# Altium PCB Rylan Power Board.PcbDoc
Units mil, origin at the board's own origin, x right, y up, seen from the top; angles counter-clockwise.
Board outline 6000 x 4000 mil, 2 copper layers (Top Layer, Bottom Layer); 103 components, 82 nets, 250 pads, 0 vias.
Unrouted connection lines stored in the file: 157.
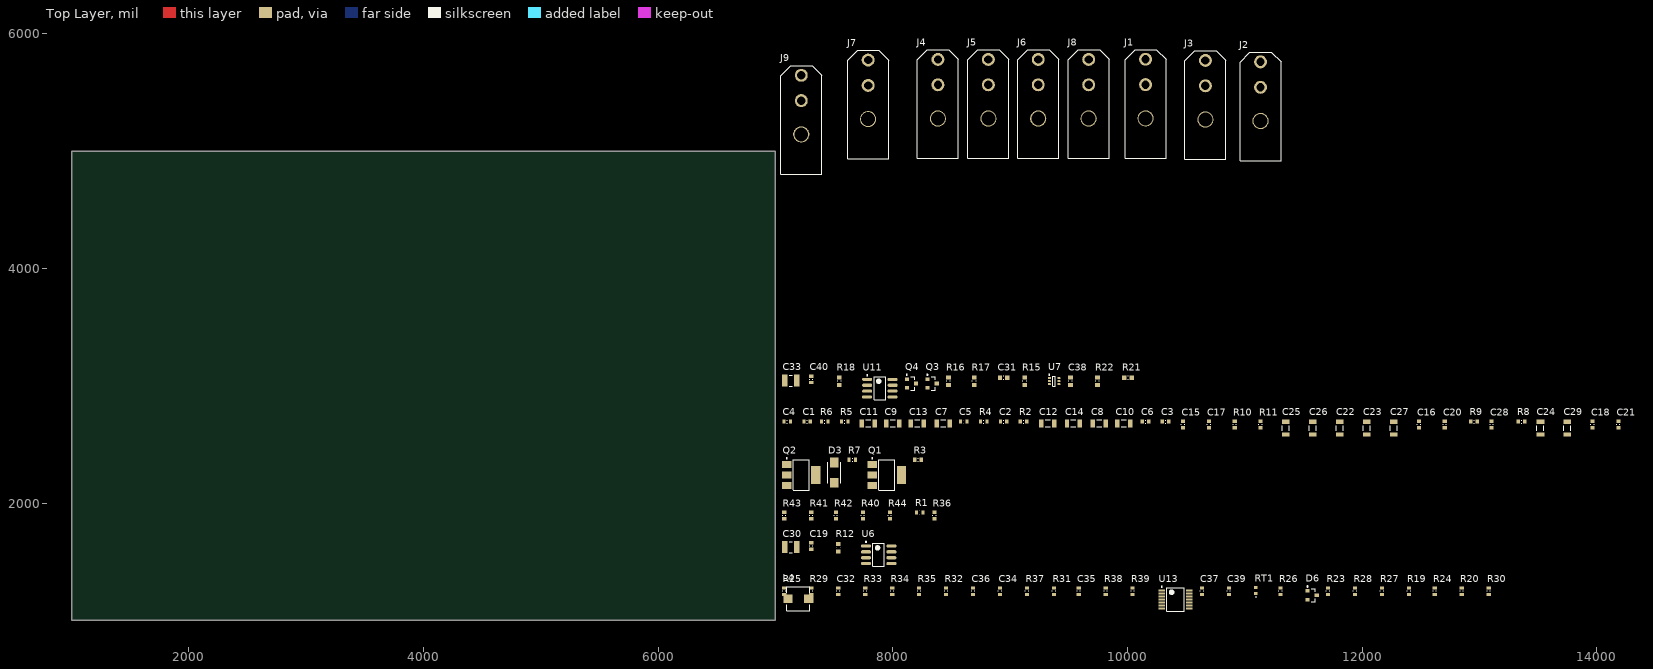
[diagram p0: Top Layer view]
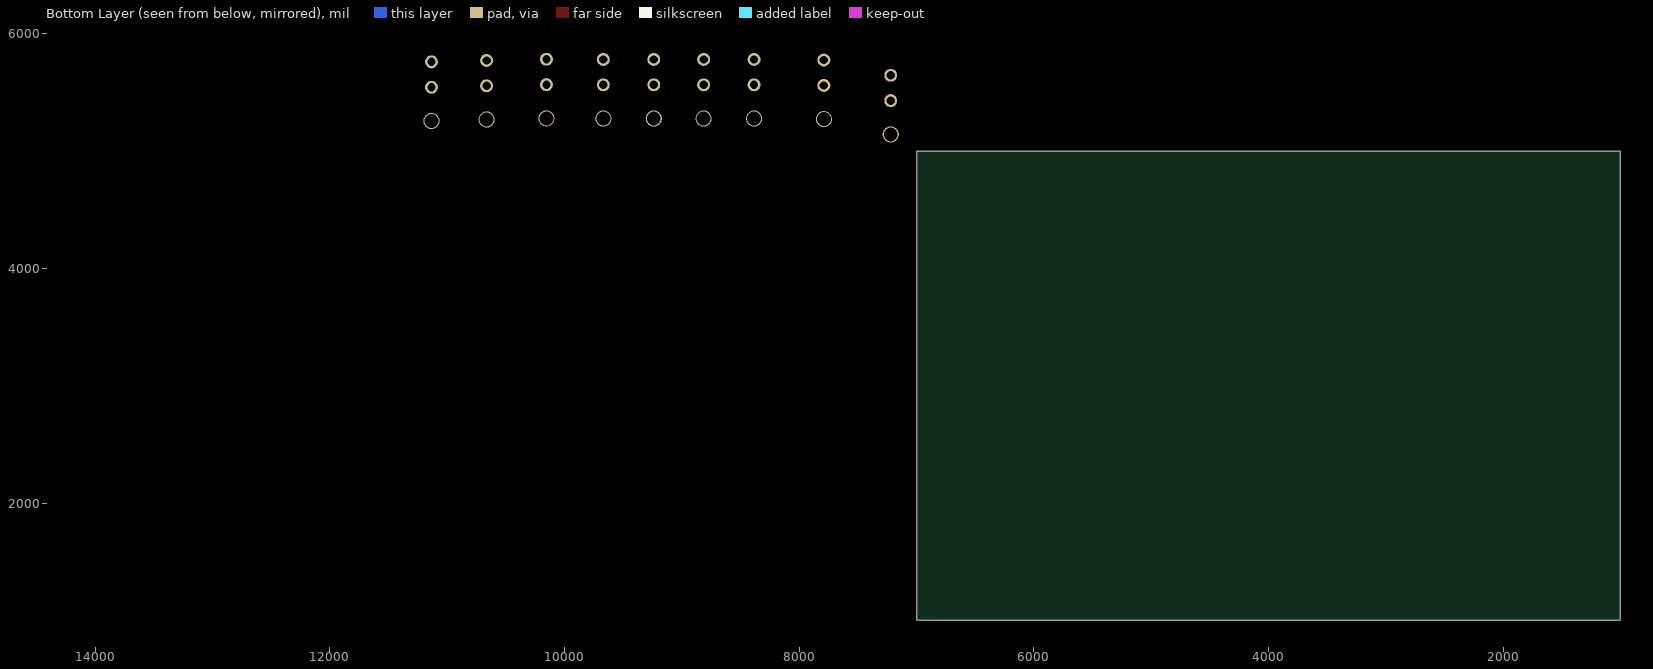
[diagram p1: Bottom Layer view, seen from below]

## Layer stack, top to bottom
Top Solder: solder mask 0.4, Solder Resist, Dk 3.5
Top Layer: signal copper 1.4
Dielectric 1: dielectric 12.6, FR-4, Dk 4.8
Bottom Layer: signal copper 1.4
Bottom Solder: solder mask 0.4, Solder Resist, Dk 3.5

## Board outline
1000,1000 7000,1000 7000,5000 1000,5000

## Design rules (kind name [scope] priority, off if disabled: settings)
Clearance [All] p1: gap=10 ignorepadtopadclearanceinfootprint=FALSE except(0: Arc-Hole Track-Hole SMDPad-Hole THPad-Hole Via-Hole Fill-Hole Poly-Hole Region-Hole Text-Hole)
PolygonConnect [All] p1: connectstyle=Relief reliefconductorwidth=10 reliefentries=4 polygonreliefangle="90 Angle" airgapwidth=10
RoomDefinition U_Thrusters [InComponentClass('U_Thrusters')] p1: confinementstyle=ConfineIn formatcopy=TRUE lockcomponents=FALSE outline 7045,2870 10110,2870 10110,3210 7045,3210
RoomDefinition U_Regulators [InComponentClass('U_Regulators')] p2: confinementstyle=ConfineIn formatcopy=TRUE lockcomponents=FALSE outline 7045,2555 14330,2555 14330,2825 7045,2825
RoomDefinition U_Power [InComponentClass('U_Power')] p3: confinementstyle=ConfineIn formatcopy=TRUE lockcomponents=FALSE outline 7045,2100 8295,2100 8295,2500 7045,2500
RoomDefinition U_Interface [InComponentClass('U_Interface')] p4: confinementstyle=ConfineIn formatcopy=TRUE lockcomponents=FALSE outline 7045,1840 8520,1840 8520,2050 7045,2050
RoomDefinition U_External [InComponentClass('U_External')] p5: confinementstyle=ConfineIn formatcopy=TRUE lockcomponents=FALSE outline 7045,1450 8045,1450 8045,1790 7045,1790
RoomDefinition U_BMS [InComponentClass('U_BMS')] p6: confinementstyle=ConfineIn formatcopy=TRUE lockcomponents=FALSE outline 7045,1060 13245,1060 13245,1405 7045,1405
RoutingVias [All] p1: holewidth=28 width=50 viastyle="Through Hole" minholewidth=28 minwidth=50 maxholewidth=28 maxwidth=50
SolderMaskExpansion [All] p1: expansion=4 istentingtop=FALSE
Width [All] p1: maxlimit=10 minlimit=10 preferedwidth=10
30 further rules are at their usual default settings.

## Classes and differential pairs
component class U_Thrusters: C31 C33 C38 C40 D4 D5 D16 J1 J2 J3 J4 J5 J6 J7 J8 Q3 Q4 R15 R16 R17 R18 R21 R22 U7 U8 U9 U11 U12
component class U_Regulators: C1 C2 C3 C4 C5 C6 C7 C8 C9 C10 C11 C12 C13 C14 C15 C16 C17 C18 C20 C21 C22 C23 C24 C25 C26 C27 C28 C29 F1 F2 F3 F4 L1 L2 L3 L4 R2 R4 R5 R6 R8 R9 R10 R11 U1 U2 U4 U5
component class U_Power: D2 D3 NT1 P2 Q1 Q2 R3 R7 R13 R14
component class U_Interface: D1 D11 D18 D19 D20 D21 D22 MH1 MH2 MH3 MH4 P1 P3 R1 R36 R40 R41 R42 R43 R44 TP1 TP2 TP3 TP4 TP5 TP6 TP7 TP8 TP9 TP10
component class U_External: C19 C30 D15 J9 R12 U3 U6
component class U_BMS: C32 C34 C35 C36 C37 C39 D6 D7 D8 D9 D10 D12 D13 D14 D17 R19 R20 R23 R24 R25 R26 R27 R28 R29 R30 R31 R32 R33 R34 R35 R37 R38 R39 RT1 U10 U13

## Components (designator, comment, footprint, x,y, rotation, side; value= is the part's Value field where it differs from the comment)
C1 "1uF 25V" CAPC0603(1608)100_L 7270,2695 r0 top value=1uF
C2 "30pF" CAPC0603(1608)100_L 8945,2695 r0 top
C3 "100nF" CAPC0603(1608)100_L 10325,2695 r0 top
C4 "1uF 25V" CAPC0603(1608)100_L 7100,2695 r0 top value=1uF
C5 "30pF" CAPC0603(1608)100_L 8605,2695 r0 top
C6 "100nF" CAPC0603(1608)100_L 10155,2695 r0 top
C7 "4.7uF" CAPC1206(3216)190_L 8430,2680 r0 top
C8 "4.7uF" CAPC1206(3216)190_L 9760,2680 r0 top
C9 "47uF" CAPC1206(3216)190_L 8000,2680 r0 top
C10 "4.7uF" CAPC1206(3216)190_L 9970,2680 r0 top
C11 "47uF" CAPC1206(3216)190_L 7790,2680 r0 top
C12 "4.7uF" CAPC1206(3216)190_L 9320,2680 r0 top
C13 "4.7uF" CAPC1206(3216)190_L 8210,2680 r0 top
C14 "4.7uF" CAPC1206(3216)190_L 9540,2680 r0 top
C15 "1uF 25V" CAPC0603(1608)100_L 10475,2670 r90 top value=1uF
C16 "12pF" CAPC0603(1608)100_L 12485,2670 r90 top
C17 "1uF 25V" CAPC0603(1608)100_L 10695,2670 r90 top value=1uF
C18 "680nF" CAPC0603(1608)100_L 13965,2670 r90 top
C19 "10nF" CAPC0603(1608)100_L 7305,1635 r90 top
C20 "75pF" CAPC0603(1608)100_L 12705,2670 r90 top
C21 "100nF" CAPC0603(1608)100_L 14185,2670 r90 top
C22 "4.7uF" CAPC1206(3216)190_L 11810,2640 r90 top
C23 "4.7uF" CAPC1206(3216)190_L 12040,2640 r90 top
C24 "4.7uF" CAPC1206(3216)190_L 13520,2640 r90 top
C25 "CAP 22uF 16V 1206(3216)" CAPC1206(3216)190_L 11350,2640 r90 top value=22uF
C26 "47uF" CAPC1206(3216)190_L 11580,2640 r90 top
C27 "10uF" CAPC1206(3216)190_L 12270,2640 r90 top
C28 "100nF" CAPC0603(1608)100_L 13105,2670 r90 top
C29 "4.7uF" CAPC1206(3216)190_L 13750,2640 r90 top
C30 "CAP 22uF 25V 1210(3225)" CAPC1210(3225)220_L 7130,1625 r0 top value=22uF
C31 "100nF" CAPC0603(1608)100_N 8945,3070 r0 top
C32 "100nF" CAPC0603(1608)100_L 7535,1250 r90 top
C33 "CAP 22uF 25V 1210(3225)" CAPC1210(3225)220_L 7130,3045 r0 top value=22uF
C34 "100nF" CAPC0603(1608)100_L 8915,1250 r90 top
C35 "100nF" CAPC0603(1608)100_L 9585,1250 r90 top
C36 "100nF" CAPC0603(1608)100_L 8685,1250 r90 top
C37 "1uF 25V" CAPC0603(1608)100_L 10635,1250 r90 top value=1uF
C38 "100nF" CAPC0603(1608)100_N 9515,3040 r90 top
C39 "1uF 25V" CAPC0603(1608)100_L 10865,1250 r90 top value=1uF
C40 "10nF" CAPC0603(1608)100_L 7305,3055 r90 top
D3 "SMAJ30CA" LFUS-DO-214AC-A-2_V 7500,2260 r90 top
D6 "MMBZ5V6ALT1G" ONSC-SOT-23-3-318-08_V 11575,1215 r0 top
J1 "" "2-pin Megafit RA" 10155,4941.42 r0 top
J2 "" "2-pin Megafit RA" 11135,4919.02 r0 top
J3 "" "2-pin Megafit RA" 10665,4931.42 r0 top
J4 "" "2-pin Megafit RA" 8385,4940 r0 top
J5 "" "2-pin Megafit RA" 8815,4940 r0 top
J6 "" "2-pin Megafit RA" 9240,4940 r0 top
J7 "" "2-pin Megafit RA" 7790,4935 r0 top
J8 "" "2-pin Megafit RA" 9670,4940 r0 top
J9 "" "2-pin Megafit RA" 7220,4805 r0 top
L4 "6.8uH" "BOURNS SRP5030T" 7195,1185 r0 top
Q1 "NVF6P02T3G" ONSC-SOT-223-4-318E-04_V 7950,2240 r0 top
Q2 "NVF6P02T3G" ONSC-SOT-223-4-318E-04_V 7220,2240 r0 top
Q3 "NVTR01P02LT1G" ONSC-SOT-23-3-318-08_V 8335,3020 r0 top
Q4 "NVTR01P02LT1G" ONSC-SOT-23-3-318-08_V 8160,3020 r0 top
R1 "1K2" RESC0603(1608)_L 8230,1920 r0 top value="1200.00 Ohm"
R2 "88K7 1%" RESC0603(1608)_L 9115,2695 r0 top value="88700.00 Ohm"
R3 "4K7" RESC0603(1608)_L 8215,2370 r0 top value="4700.00 Ohm"
R4 "88K7 1%" RESC0603(1608)_L 8775,2695 r0 top value="88700.00 Ohm"
R5 "22K1 1%" RESC0603(1608)_L 7590,2695 r0 top value="22100.00 Ohm"
R6 "22K1 1%" RESC0603(1608)_L 7420,2695 r0 top value="22100.00 Ohm"
R7 "4K7" RESC0603(1608)_L 7655,2370 r0 top value="4700.00 Ohm"
R8 "200K 1%" RESC0603(1608)_L 13360,2695 r0 top value="200000.00 Ohm"
R9 "51K 1%" RESC0603(1608)_L 12955,2695 r0 top value="51000.00 Ohm"
R10 "22K1 1%" RESC0603(1608)_L 10915,2670 r90 top value="22100.00 Ohm"
R11 "22K1 1%" RESC0603(1608)_L 11135,2670 r90 top value="22100.00 Ohm"
R12 "10K" RESC0603(1608)_N 7535,1620 r90 top value="10000.00 Ohm"
R15 "10K" RESC0603(1608)_N 9125,3040 r90 top value="10000.00 Ohm"
R16 "100R" RESC0603(1608)_N 8475,3040 r90 top value="100.00 Ohm"
R17 "100R" RESC0603(1608)_N 8695,3040 r90 top value="100.00 Ohm"
R18 "10K" RESC0603(1608)_N 7545,3040 r90 top value="10000.00 Ohm"
R19 "100R" RESC0603(1608)_L 12400,1250 r90 top value="100.00 Ohm"
R20 "4K7" RESC0603(1608)_L 12850,1250 r90 top value="4700.00 Ohm"
R21 "7K5 1%" RESC0603(1608)_N 10005,3070 r0 top value="7500.00 Ohm"
R22 "10K" RESC0603(1608)_N 9745,3040 r90 top value="10000.00 Ohm"
R23 "100R" RESC0603(1608)_L 11710,1250 r90 top value="100.00 Ohm"
R24 "100R" RESC0603(1608)_L 12620,1250 r90 top value="100.00 Ohm"
R25 "100R" RESC0603(1608)_L 7075,1250 r90 top value="100.00 Ohm"
R26 "16K5" RESC0603(1608)_L 11305,1250 r90 top value="16500.00 Ohm"
R27 "294K" RESC0603(1608)_L 12170,1250 r90 top value="294000.00 Ohm"
R28 "100R" RESC0603(1608)_L 11940,1250 r90 top value="100.00 Ohm"
R29 "100R" RESC0603(1608)_L 7305,1250 r90 top value="100.00 Ohm"
R30 "4K7" RESC0603(1608)_L 13080,1250 r90 top value="4700.00 Ohm"
R31 "100R 1%" RESC0603(1608)_L 9375,1250 r90 top value="100.00 Ohm"
R32 "100R 1%" RESC0603(1608)_L 8455,1250 r90 top value="100.00 Ohm"
R33 "100R" RESC0603(1608)_L 7765,1250 r90 top value="100.00 Ohm"
R34 "100R" RESC0603(1608)_L 7995,1250 r90 top value="100.00 Ohm"
R35 "100R" RESC0603(1608)_L 8225,1250 r90 top value="100.00 Ohm"
R36 "1K2" RESC0603(1608)_L 8355,1895 r90 top value="1200.00 Ohm"
R37 "100R" RESC0603(1608)_L 9145,1250 r90 top value="100.00 Ohm"
R38 "100R" RESC0603(1608)_L 9815,1250 r90 top value="100.00 Ohm"
R39 "100R" RESC0603(1608)_L 10045,1250 r90 top value="100.00 Ohm"
R40 "470R" RESC0603(1608)_L 7745,1895 r90 top value="470.00 Ohm"
R41 "220R" RESC0603(1608)_L 7305,1895 r90 top value="220.00 Ohm"
R42 "220R" RESC0603(1608)_L 7515,1895 r90 top value="220.00 Ohm"
R43 "100R" RESC0603(1608)_L 7075,1895 r90 top value="100.00 Ohm"
R44 "1K2" RESC0603(1608)_L 7975,1895 r90 top value="1200.00 Ohm"
RT1 "NCP18XH103F03RB" MURA-NCP18XH103F03RB-2_V 11095,1255 r90 top
U6 "MIC5021YM" MICL-SOICN-8LD-PL-1_V 7880,1560 r0 top
U7 "SN74LVC1G97QDCKRQ1" DCK0006A_L 9375,3040 r0 top
U11 "MIC5021YM" MICL-SOICN-8LD-PL-1_V 7890,2980 r0 top
U13 "SN74HC164PW" PW0014A_N 10410,1180 r0 top

## Footprints (in the part's own frame and the unit in brackets; to place one, negate y for a bottom-side part, rotate by r counter-clockwise, add the part's x,y. Pads: shape width x height; smd on the part's side, far side on the other; paste and mask are expansions set on the pad)
"2-pin Megafit RA" [mm]
  round 2.8 hole 1.8: 1(0,15.9) 2(0,21.4)
  round 3.5 hole 3: ""(0,8.6)
  silkscreen extent -4.44,0 4.44,23.49, body extent -4.16,-24.98 4.19,21.9, height 16.75
"BOURNS SRP5030T" [mm] "Precision Wire Wound Inductor, 2-Leads, Body 5.70x5.20mm, IPC Medium Density"
  rect 2x1.8 smd: 1(-2.25,0) 2(2.25,0)
  silkscreen extent -2.5,-2.6 2.5,2.6, body extent -2.85,-2.6 2.85,2.6, height 3
CAPC0603(1608)100_L [mm] "Chip Capacitor, Body 1.6x0.8mm, Height 1.0mm, IPC High Density"
  rect 0.7x0.9 smd: 1(-0.7,0) 2(0.7,0)
  silkscreen extent -0.05,-0.35 0.05,0.35, body extent -0.87,-0.47 0.88,0.48, height 1
CAPC0603(1608)100_N [mm] "Chip Capacitor, Body 1.6x0.8mm, Height 1.0mm, IPC Medium Density"
  rect 0.9x1 smd: 1(-0.8,0) 2(0.8,0)
  silkscreen extent -0.05,-0.4 0.05,0.4, body extent -0.87,-0.48 0.88,0.47, height 1
CAPC1206(3216)190_L [mm] "Chip Capacitor, Body 3.2x1.6mm, Height 1.9mm, IPC High Density"
  rect 0.95x1.7 smd: 1(-1.4,0) 2(1.4,0)
  silkscreen extent -0.55,-0.75 0.55,0.75, body extent -1.7,-0.9 1.7,0.9, height 1.9
CAPC1210(3225)220_L [mm] "Chip Capacitor, Body 3.2x2.5mm, Height 2.2mm, IPC High Density"
  rect 1.2x2.6 smd: 1(-1.275,0) 2(1.275,0)
  silkscreen extent -0.3,-1.2 0.3,1.2, body extent -1.7,-1.35 1.7,1.35, height 2.2
DCK0006A_L [mm] "SOT23, 6-Leads, Body 2.15x1.4mm, Pitch 0.65mm, IPC High Density"
  rrect25% 0.65x0.4 smd: 1(-1.025,0.65) 2(-1.025,0) 3(-1.025,-0.65) 4(1.025,-0.65) 5(1.025,0) 6(1.025,0.65)
  silkscreen extent -1.15,-1.1 0.3,1.52, body extent -1.14,-1 1.14,1, height 0.94
LFUS-DO-214AC-A-2_V [mm] "Molded Diode, 2-Leads, Body 4.6x2.79mm"
  rect 2.1x1.8 smd: 1(-2.2,0) 2(2.2,0)
  silkscreen extent -2.3,-1.4 2.3,1.4, body extent -2.52,-1.4 2.52,1.4, height 2.29
MICL-SOICN-8LD-PL-1_V [mm] "SOIC, 8-Leads, Body 5x4mm, Pitch 1.27mm"
  oval 2.2x0.7 smd: 1(-2.75,1.905) 2(-2.75,0.635) 3(-2.75,-0.635) 4(-2.75,-1.905) 5(2.75,-1.905) 6(2.75,-0.635) 7(2.75,0.635) 8(2.75,1.905)
  silkscreen extent -2.87,-2.5 1.25,2.93, body extent -3.01,-2.44 3.01,2.45, height 1.73
MURA-NCP18XH103F03RB-2_V [mm] "Chip, 2-Leads, Body 1.6x0.8mm"
  rect 0.65x0.7 smd: 1(-0.675,0) 2(0.675,0)
  silkscreen extent -1.45,-0.05 -1.35,0.05, body extent -0.8,-0.4 0.8,0.4, height 0.8
ONSC-SOT-23-3-318-08_V [mm] "SOT23, 3-Leads, Body 2.92x1.3mm, Pitch 0.95mm"
  rect 0.9x0.8 smd: 1(-1,0.95) 2(-1,-0.95) 3(1,0)
  silkscreen extent -1.12,-1.46 0.65,2.02, body extent -0.65,-1.46 0.65,1.46, height 1.11
ONSC-SOT-223-4-318E-04_V [mm] "SOT223, 4-Leads, Body 6.5x3.5mm, Pitch 2.3mm"
  rect 2x1.5 smd: 1(-3.15,2.3) 2(-3.15,0) 3(-3.15,-2.3)
  rect 2x3.8 smd: 4(3.15,0)
  silkscreen extent -3.27,-3.25 1.75,3.72, body extent -1.75,-3.25 1.75,3.25, height 1.75
PW0014A_N [mm] "SOP, 14-Leads, Body 5.1x4.5mm, Pitch 0.65mm, IPC Medium Density"
  rrect22% 1.4x0.45 smd: 1(-2.95,1.95) 2(-2.95,1.3) 3(-2.95,0.65) 4(-2.95,0) 5(-2.95,-0.65) 6(-2.95,-1.3) 7(-2.95,-1.95) 8(2.95,-1.95) 9(2.95,-1.3) 10(2.95,-0.65) 11(2.95,0) 12(2.95,0.65) 13(2.95,1.3) 14(2.95,1.95)
  silkscreen extent -3.07,-2.55 1.85,2.85, body extent -3.21,-2.5 3.21,2.5, height 1
RESC0603(1608)_L [mm] "Chip Resistor, Body 1.6x0.8mm, IPC High Density"
  rect 0.7x0.9 smd: 1(-0.7,0) 2(0.7,0)
  silkscreen extent -0.05,-0.35 0.05,0.35, body extent -0.85,-0.47 0.85,0.47, height 0.6
RESC0603(1608)_N [mm] "Chip Resistor, Body 1.6x0.8mm, IPC Medium Density"
  rect 0.9x1 smd: 1(-0.8,0) 2(0.8,0)
  silkscreen extent -0.05,-0.4 0.05,0.4, body extent -0.85,-0.47 0.85,0.47, height 0.6

## Part data
C1 C4 C15 C17 C37 C39: library part CMP-1035-02740-1, "CAP 1uF 25V ±10% 0603 (1608 Metric) Thickness 1mm SMD", Case-EIA=0603, Case-Metric=1608, Rated Voltage="25 V", Tolerance=Â±10%, Max Thickness="1 mm", Technology=SMT
C2 C5: library part CMP-1035-00915-1, "CAP 30pF 50V ±10% 0603 (1608 Metric) Thickness 1mm SMD", Case-EIA=0603, Case-Metric=1608, Rated Voltage="50 V", Tolerance=Â±10%, Max Thickness="1 mm", Technology=SMT
C3 C6 C21 C28 C32 C34 C35 C36: library part CMP-1035-02595-1, "CAP 100nF 100V ±10% 0603 (1608 Metric) Thickness 1mm SMD", Case-EIA=0603, Case-Metric=1608, Rated Voltage="100 V", Tolerance=Â±10%, Max Thickness="1 mm", Technology=SMT
C7 C8 C10 C12 C13 C14 C22 C23 C24 C29: library part CMP-1037-04922-1, "CAP 4.7uF 35V ±10% 1206 (3216 Metric) Thickness 1.9mm SMD", Case-EIA=1206, Case-Metric=3216, Rated Voltage="35 V", Tolerance=Â±10%, Max Thickness="1.9 mm", Technology=SMT
  C7 C13 C22 C23: Supplier 1=Digi-Key
C9 C11 C26: library part CMP-1037-05003-1, "CAP 47uF 16V ±20% 1206 (3216 Metric) Thickness 1.9mm SMD", Case-EIA=1206, Case-Metric=3216, Rated Voltage="16 V", Tolerance=Â±20%, Max Thickness="1.9 mm", Technology=SMT
C16: library part CMP-1035-00615-1, "CAP 12pF 50V ±0.25pF 0603 (1608 Metric) Thickness 1mm SMD", Case-EIA=0603, Case-Metric=1608, Rated Voltage="50 V", Tolerance=Â±0.25pF, Max Thickness="1 mm", Technology=SMT
C18: library part CMP-1035-02724-1, "CAP 680nF 50V ±10% 0603 (1608 Metric) Thickness 1mm SMD", Case-EIA=0603, Case-Metric=1608, Rated Voltage="50 V", Tolerance=Â±10%, Max Thickness="1 mm", Technology=SMT
C19 C40: library part CMP-1035-02315-1, "CAP 10nF 25V ±2% 0603 (1608 Metric) Thickness 1mm SMD", Case-EIA=0603, Case-Metric=1608, Rated Voltage="25 V", Tolerance=Â±2%, Max Thickness="1 mm", Technology=SMT
C20: library part CMP-1035-01189-1, "CAP 75pF 25V ±1% 0603 (1608 Metric) Thickness 1mm SMD", Case-EIA=0603, Case-Metric=1608, Rated Voltage="25 V", Tolerance=Â±1%, Max Thickness="1 mm", Technology=SMT
C25: library part CMP-1037-04993-1, "CAP 22uF 16V ±20% 1206 (3216 Metric) Thickness 1.9mm SMD", Case-EIA=1206, Case-Metric=3216, Rated Voltage="16 V", Tolerance=Â±20%, Max Thickness="1.9 mm", Technology=SMT
C27: library part CMP-1037-04982-1, "CAP 10uF 50V ±10% 1206 (3216 Metric) Thickness 1.9mm SMD", Case-EIA=1206, Case-Metric=3216, Rated Voltage="50 V", Tolerance=Â±10%, Max Thickness="1.9 mm", Technology=SMT
C30 C33: library part CMP-1038-02286-1, "CAP 22uF 25V -20% to +80% 1210 (3225 Metric) Thickness 2.2mm SMD", Case-EIA=1210, Case-Metric=3225, Rated Voltage="25 V", Tolerance="-20% to +80%", Max Thickness="2.2 mm", Technology=SMT
C31 C38: library part CMP-1035-02580-1, "CAP 100nF 10V ±10% 0603 (1608 Metric) Thickness 1mm SMD", Case-EIA=0603, Case-Metric=1608, Rated Voltage="10 V", Tolerance=Â±10%, Max Thickness="1 mm", Technology=SMT
D3: library part CMP-2000-07088-1, "Transient Voltage Suppression Diode, 30 V, -65 to 150 degC, 2-Pin SMD, RoHS, Tape and Reel", Capacitance @ Frequency=-, Current - Peak Pulse (10/1000µs)=8.3A, Manufacturer=Littelfuse-Inc., Operating Temperature=-55°C~150°C(TJ), Package / Case=DO-214AC,SMA, Package Description="2-Pin Surface Mount Device, Body 4.295 x 2.595 mm", Package Reference=DO-214AC, Power - Peak Pulse=400W, Power Line Protection=No, Supplier Device Package=DO-214AC(SMA), Voltage - Breakdown (Min)=33.3V, Voltage - Clamping (Max) @ Ipp=48.4V, Voltage - Reverse Standoff (Typ)=30V, Applications=GeneralPurpose, Bidirectional Channels=1, Category=CircuitProtection, Datasheet URL=http://www.littelfuse.com/~/media/electronics/datasheets/tvs_diodes/littelfuse_tvs_diode_smaj_datasheet.pdf.pdf, Datasheet Version=11/2015, Family=TVS-Diodes, Manufacturer URL=http://www.littelfuse.com/, Mounting Technology=SurfaceMount, Mounting Type=SurfaceMount, Packaging=Digi-Reel®, Series=SMAJ, TYPE=Zener, Unidirectional Channels=-
D6: library part CMP-1060-01222-1, "24 W Peak Power Zener Transient Voltage Suppressor, Dual Common Anode Zeners for ESD Protection, 3-Pin SOT-23, Pb-Free, Tape and Reel", Manufacturer="On Semiconductor", ComponentLink1Description="Manufacturer URL", ComponentLink1URL=http://www.onsemi.com/, ComponentLink2Description=Datasheet, ComponentLink2URL=http://www.onsemi.cn/pub_link/Collateral/MMBZ5V6ALT1-D.PDF, ComponentLink3Description="Package Specification", ComponentLink3URL=http://www.onsemi.cn/pub_link/Collateral/318-08.PDF, DatasheetVersion="Rev. 13", Mounting Technology="Surface Mount", PackageDescription="3-Pin Small Outline Transistor, Body 2.92 x 1.3 mm, Pitch 0.95 mm", PackageReference=SOT-23-3-318-08, PackageVersion="Rev. AP, 11/2009", Packing="Tape and Reel", PartNumber=MMBZ5V6ALT1G, RoHS=Pb-Free, VZ Typ (V)=5.6
J1 J2 J3 J4 J5 J6 J7 J8 J9: library part "2-pin megafit"
L4: library part SRP5030TA, DC Resistance (DCR)="76.2 mOhm Max", Manufacturer="Bourns Inc.", Manufacturer Part Number=SRP5030TA-6R8M, Operating Temperature="-40°C ~ 150°C", Package / Case=Nonstandard, Q @ Freq="15 @ 100kHz", Ratings=AEC-Q200, Supplier Device Package=-, Supplier Part Number 1=SRP5030TA-6R8MCT-ND, Tolerance=±20%, Category="Inductors, Coils, Chokes", ComponentLink1Description=http://www.bourns.com/docs/Product-Datasheets/SRP5030TA.pdf, ComponentLink1URL=http://www.bourns.com/docs/Product-Datasheets/SRP5030TA.pdf, Height - Seated (Max)="0.118\" (3.00mm)", Material - Core="Carbonyl Powder", Mounting Type="Surface Mount", Packaging="Cut Tape (CT)", Part Status=Active, Pricing 1="1=1.51, 10=1.397, 100=0.9781, 500=0.79178, 1000=0.72191 (USD)", RoHS="RoHS Compliant", Shielding=Shielded, Size / Dimension="0.224\" L x 0.205\" W (5.70mm x 5.20mm)", Stock 1=5626, Supplier 1=Digi-Key, TYPE=Wirewound
Q1 Q2: library part CMP-1058-00713-1, "Power MOSFET, -10 A, -20 V, P-Channel, 4-Pin SOT-223, Pb-Free, Tape and Reel", Manufacturer="On Semiconductor", Package Type="SOT-223-4 / TO-261-4", Channel Polarity="P Channel", ComponentLink1Description="Manufacturer URL", ComponentLink1URL=http://www.onsemi.com/, ComponentLink2Description=Datasheet, ComponentLink2URL=http://www.onsemi.com/pub_link/Collateral/NTF6P02T3-D.PDF, ComponentLink3Description="Package Specification", ComponentLink3URL=http://www.onsemi.com/pub_link/Collateral/318E-04.PDF, Configuration=Single, DatasheetVersion="Rev. 6", Mounting Technology="Surface Mount", PackageDescription="4-Pin Small Outline Transistor, Body 6.5 x 3.5 mm, Pitch 2.3 mm", PackageReference=SOT-223-4-318E-04, PackageVersion="Rev. N, 08/2009", Packing="Tape and Reel", PartNumber=NVF6P02T3G, PD Max (W)=8.3, Qrr Typ (nC)=36, RoHS=Pb-Free, V(BR)DSS Min (V)=20, VGS Max (V)=8, VGS(th) Max (V)=1
Q3 Q4: library part CMP-1058-00752-1, "Power MOSFET, -20 V, -1.3 A, P-Channel, 3-Pin SOT-23, Pb-Free, Tape and Reel", Manufacturer="On Semiconductor", Package Type=SOT-23-3, Channel Polarity="P Channel", Ciss Typ (pF)=225, ComponentLink1Description="Manufacturer URL", ComponentLink1URL=http://www.onsemi.com/, ComponentLink2Description=Datasheet, ComponentLink2URL=http://www.onsemi.cn/pub_link/Collateral/NTR1P02LT1-D.PDF, ComponentLink3Description="Package Specification", ComponentLink3URL=http://www.onsemi.cn/pub_link/Collateral/318-08.PDF, Configuration=Single, Coss Typ (pF)=130, Crss Typ (pF)=55, DatasheetVersion="Rev. 13", ID Max (A)=1.3, Mounting Technology="Surface Mount", PackageDescription="3-Pin Small Outline Transistor, Body 2.92 x 1.3 mm, Pitch 0.95 mm", PackageReference=SOT-23-3-318-08, PackageVersion="Rev. AP, 11/2009", Packing="Tape and Reel", PartNumber=NVTR01P02LT1G, PD Max (W)=0.4, Qrr Typ (nC)=8.5, RoHS=Pb-Free, V(BR)DSS Min (V)=20, VGS Max (V)=12, VGS(th) Max (V)=1.25
R1 R36 R44: library part CMP-1012-00518-1, "1K2 0.1W 1% 0603 (1608 Metric)  SMD", Case-EIA=0603, Case-Metric=1608, Power="0.1 W", Tolerance="1 %", Technology=SMT
R2 R4: library part CMP-1012-00730-1, "88K7 0.1W 1% 0603 (1608 Metric)  SMD", Case-EIA=0603, Case-Metric=1608, Power="0.1 W", Tolerance="1 %", Technology=SMT
R3 R7 R20 R30: library part CMP-1012-00586-1, "4K7 0.1W 1% 0603 (1608 Metric)  SMD", Case-EIA=0603, Case-Metric=1608, Power="0.1 W", Tolerance="1 %", Technology=SMT
R5 R6 R10 R11: library part CMP-1012-00660-1, "22K1 0.1W 1% 0603 (1608 Metric)  SMD", Case-EIA=0603, Case-Metric=1608, Power="0.1 W", Tolerance="1 %", Technology=SMT
R8: library part CMP-1012-00768-1, "200K 0.1W 1% 0603 (1608 Metric)  SMD", Case-EIA=0603, Case-Metric=1608, Power="0.1 W", Tolerance="1 %", Technology=SMT
R9: library part CMP-1012-00703-1, "51K 0.1W 1% 0603 (1608 Metric)  SMD", Case-EIA=0603, Case-Metric=1608, Power="0.1 W", Tolerance="1 %", Technology=SMT
R12 R15 R18 R22: library part CMP-1012-00098-1, "10K 0.1W 5% 0603 (1608 Metric)  SMD", Case-EIA=0603, Case-Metric=1608, Power="0.1 W", Tolerance="5 %", Technology=SMT
R16 R17 R25 R29 R33 R34 R35 R37 R38 R39 R43: library part CMP-1012-00050-1, "100R 0.1W 5% 0603 (1608 Metric)  SMD", Case-EIA=0603, Case-Metric=1608, Power="0.1 W", Tolerance="5 %", Technology=SMT
R19 R23 R24 R28 R31 R32: library part CMP-1012-00397-1, "100R 0.1W 1% 0603 (1608 Metric)  SMD", Case-EIA=0603, Case-Metric=1608, Power="0.1 W", Tolerance="1 %", Technology=SMT
R21: library part CMP-1012-00609-1, "7K5 0.1W 1% 0603 (1608 Metric)  SMD", Case-EIA=0603, Case-Metric=1608, Power="0.1 W", Tolerance="1 %", Technology=SMT
R26: library part CMP-1012-00646-1, "16K5 0.1W 1% 0603 (1608 Metric)  SMD", Case-EIA=0603, Case-Metric=1608, Power="0.1 W", Tolerance="1 %", Technology=SMT
R27: library part CMP-1012-00787-1, "294K 0.1W 1% 0603 (1608 Metric)  SMD", Case-EIA=0603, Case-Metric=1608, Power="0.1 W", Tolerance="1 %", Technology=SMT
R40: library part CMP-1012-00473-1, "470R 0.1W 1% 0603 (1608 Metric)  SMD", Case-EIA=0603, Case-Metric=1608, Power="0.1 W", Tolerance="1 %", Technology=SMT
R41 R42: library part CMP-1012-00058-1, "220R 0.1W 5% 0603 (1608 Metric)  SMD", Case-EIA=0603, Case-Metric=1608, Power="0.1 W", Tolerance="5 %", Technology=SMT
RT1: library part CMP-2000-05271-1, "NTC Thermistor, 10 KOhm, +/- 1%, 0.1 W, -40 to 125 degC, 0603 (1608 Metric), RoHS, Tape and Reel", Manufacturer=Murata, Rated Current=310A, Resistance=10kO, Temperature Range=-40to+125degC, Tolerance (%)=±1%, B-constant=3434K, Datasheet URL=http://www.jameco.com/Jameco/Products/ProdDS/1870999.pdf, Datasheet Version=Apr-05, Manufacturer URL=http://www.murata.com/, TYPE=NTC
U6 U11: library part CMP-1558-00003-1, "High-Speed High-Side MOSFET Driver, 12 to 36 V, -40 to 85 degC, 8-Pin SOIC, RoHS, Tube", Temperature Max="85 degC", Temperature Min="-40 degC", ComponentLink1Description="Manufacturer URL", ComponentLink1URL=http://www.micrel.com/, ComponentLink2Description=Datasheet, ComponentLink2URL=http://www.micrel.com/_PDF/mic5021.pdf, ComponentLink3Description="Package Specification", ComponentLink3URL=http://www.micrel.com/_Packages/SOICN-8LD-PL-1.pdf, Mounting Technology="Surface Mount", PackageDescription="8-Pin Small Outline Integrated Package, Body 4.89 x 3.90 mm, Pitch 1.27 mm", PackageVersion="Rev. A", Packing=Tube, PartNumber=MIC5021YM, RoHS=TRUE, VDD Max="36 V", VDD Min="12 V"
U7: library part CMP-0859-00512-3, "Automotive Catalog Configurable Multiple-Function Gate, DCK0006A, LARGE T&R", F @ Nom Voltage(Max)(Mhz)=150, Generic Part Number=SN74LVC1G97-Q1, ICC @ Nom Voltage(Max)(mA)=0.01, Manufacturer="Texas Instruments", Operating Temperature Range(C)="-40 to 125", Rating=Automotive, tpd @ Nom Voltage(Max)(ns)=16.4,9.3,7.3,6.1, Voltage(Nom)(V)=1.8,2.5,3.3,5, 3-State Output=No, Bits(#)=1, DatasheetVersion=SCES561D, Gate Type=Configurable, Input Type=CMOS/TTL, Logic=True, Output Drive (IOL/IOH)(Max)(mA)=32/-32, Output Type=CMOS, PackageReference=DCK0006A, Schmitt Trigger=No, Sub-Family="Configurable Logic", Technology Family=LVC, VCC(Max)(V)=5.5, VCC(Min)(V)=1.65
U13: library part CMP-0780-00173-3, "8-Bit Parallel-Out Serial Shift Registers, PW0014A, TUBE", F @ Nom Voltage(Max)(Mhz)=28, Generic Part Number=SN74HC164, ICC @ Nom Voltage(Max)(mA)=0.08, Manufacturer="Texas Instruments", Operating Temperature Range(C)="-40 to 125", Rating=Catalog, tpd @ Nom Voltage(Max)(ns)=38, Voltage(Nom)(V)=6, 3-State Output=No, Bits=4, Code_JEDEC=MO-153, DatasheetVersion=SCLS115F, Input Type=CMOS, Output Drive (IOL/IOH)(Max)(mA)=5.2/-5.2, Output Type=CMOS, PackageReference=PW0014A, PackageVersion=http://www.ti.com/lit/ml/mpds360/mpds360.pdf, Technology Family=HC, VCC(Max)(V)=6, VCC(Min)(V)=2

## Nets (pads, with @x,y where several pads share a name; then routed paths per layer and width w, separated by ;. In a path a pad name is that pad's centre, name@x,y a point inside that pad or via, vN(x,y) a via of type N, cw(c..) or ccw(c..) an arc to the next point about the centre after c; other vN are vias at no path point)
EXT_GATE: U6.7
GATE_EN: R18.1 U7.4 U11.2
GND: C1.1 C4.1 C7.1 C8.1 C9.1 C10.1 C11.1 C12.1 C13.1 C14.1 C15.1 C17.1 C22.1 C23.1 C24.1 C25.1 C26.1 C27.1 C28.1 C29.1 C30.1 C31.1 C32.1 C33.1 C35.1 C36.1 C37.1 C38.1 C39.1 D3.2 D6.3 J1.1 J2.1 J3.1 J4.1 J5.1 J6.1 J7.1 J8.1 J9.1 R5.1 R6.1 R10.1 R11.1 R12.2 R15.2 R16.2 R17.2 R18.2 R21.2 R26.1 U6.4 U7.2 U11.4 U13.7
NetC1_2: C1.2
NetC2_1: C2.1 R2.1 R5.2
NetC2_2: C2.2 C7.2 C9.2 R2.2
NetC3_1: C3.1
NetC3_2: C3.2
NetC4_2: C4.2
NetC5_1: C5.1 R4.1 R6.2
NetC5_2: C5.2 C11.2 C13.2 R4.2
NetC6_1: C6.1
NetC6_2: C6.2
NetC15_2: C15.2
NetC16_1: C16.1 R8.1 R10.2
NetC16_2: C16.2 C22.2 C25.2 R8.2
NetC17_2: C17.2
NetC18_1: C18.1
NetC18_2: C18.2
NetC19_1: C19.1 U6.8
NetC20_1: C20.1 R9.1 R11.2
NetC20_2: C20.2 C23.2 C26.2 L4.2 R9.2
NetC21_1: C21.1 L4.1
NetC21_2: C21.2
NetC40_1: C40.1 U11.8
NetD1_2: R1.1
NetD2_2: Q1.3 Q2.3 R3.2 R7.2
NetD4_1: R16.1
NetD4_2: Q4.3
NetD5_1: R17.1
NetD5_2: Q3.3
NetD6_1: D6.1 R23.2 R28.1
NetD6_2: D6.2 R19.2 R24.1
NetD7_1: R25.2
NetD8_1: R29.2
NetD9_1: R33.2
NetD10_1: R34.2
NetD11_2: R36.1
NetD12_1: R35.2
NetD13_1: R37.2
NetD14_1: R38.2
NetD17_1: R39.2
NetD18_2: R40.1
NetD19_2: R41.1
NetD20_2: R42.1
NetD21_2: R43.1
NetD22_2: R44.1
NetP3_5: Q1.1 Q2.1 R3.1 R7.1
NetP3_6: R28.2 R30.1
NetP3_11: R12.1 U6.2
NetP3_13: R20.1 R24.2
NetR19_1: R19.1
NetR21_1: R21.1
NetR23_1: R23.1
NetR25_1: R25.1 U13.13
NetR26_2: R26.2 R27.1
NetR29_1: R29.1 U13.12
NetR33_1: R33.1 U13.11
NetR34_1: R34.1 U13.10
NetR35_1: R35.1 U13.6
NetR37_1: R37.1 U13.5
NetR38_1: R38.1 U13.4
NetR39_1: R39.1 U13.3
NetRT1_2: RT1.2
OCP_N: Q4.1 R22.1 U7.3
P1: U13.1 U13.2
P2: U13.8
REG25: C39.2 RT1.1
RSENSE+: R31.1
RSENSE-: R32.1
SRN: C34.1 C36.2 R32.2
SRP: C34.2 C35.2 R31.2
THRST_EN: Q3.1 R15.1 U7.6
THRUSTERS_GATE: U11.7
VBAT: C30.2 C33.2 C37.2 D3.1 R27.2 U6.1 U11.1
VBAT_EXT: C19.2 J9.2 R36.2 U6.5 U6.6
VBAT_THRUSTERS: C40.2 J1.2 J2.2 J3.2 J4.2 J5.2 J6.2 J7.2 J8.2 R44.2 U11.5 U11.6
VCC_3V3: C31.2 C32.2 C38.2 Q3.2 Q4.2 R20.2 R22.2 R30.2 R43.2 U7.1 U7.5 U13.9 U13.14
VCC_5V: R42.2
VCC_5V_SRV: R41.2
VCC_10V: R40.2
VCC_BATT_FILT: C8.2 C10.2 C12.2 C14.2 C24.2 C27.2 C28.2 C29.2 Q1.2 Q1.4 Q2.2 Q2.4 R1.2
pads on no net: J1. J2. J3. J4. J5. J6. J7. J8. J9. U6.3 U11.3